# Altium PCB PCB_LilBrain32_2022-08-17.pcbdoc
Units mil, origin at the board's own origin, x right, y up, seen from the top; angles counter-clockwise.
Board outline 3740.15 x 2251.93 mil, 2 copper layers (Top Layer, Bottom Layer); 27 components, 63 nets, 147 pads, 71 vias.
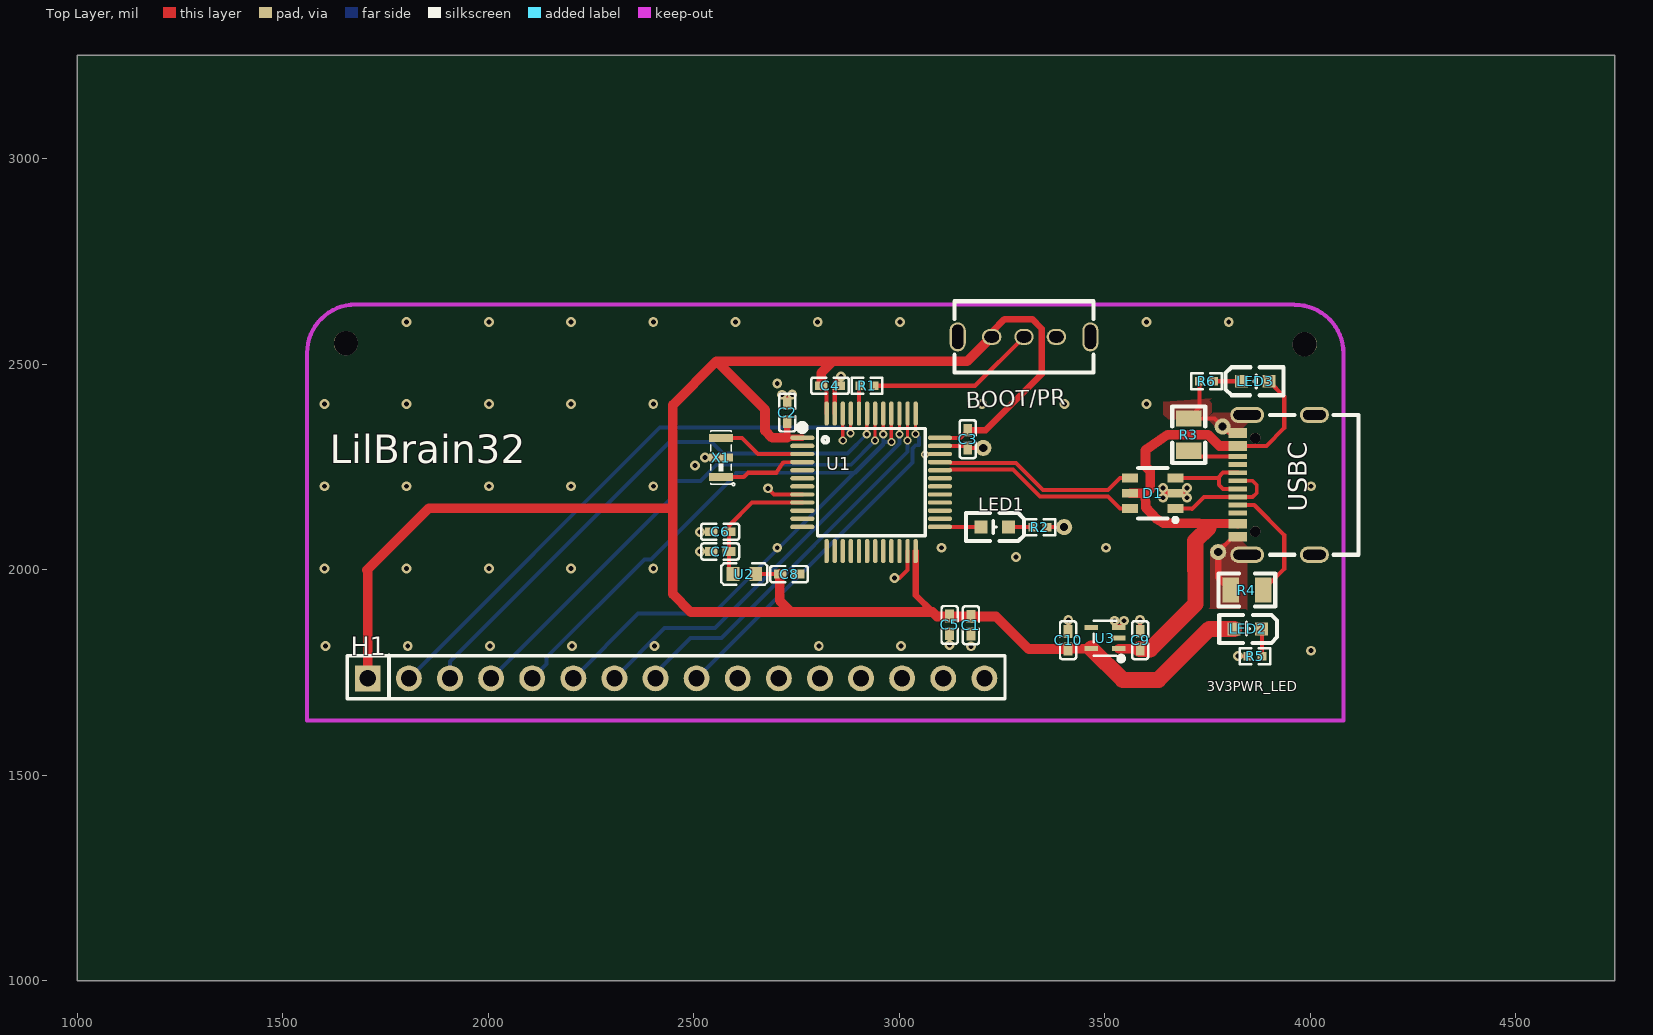
[diagram p0: Top Layer view]
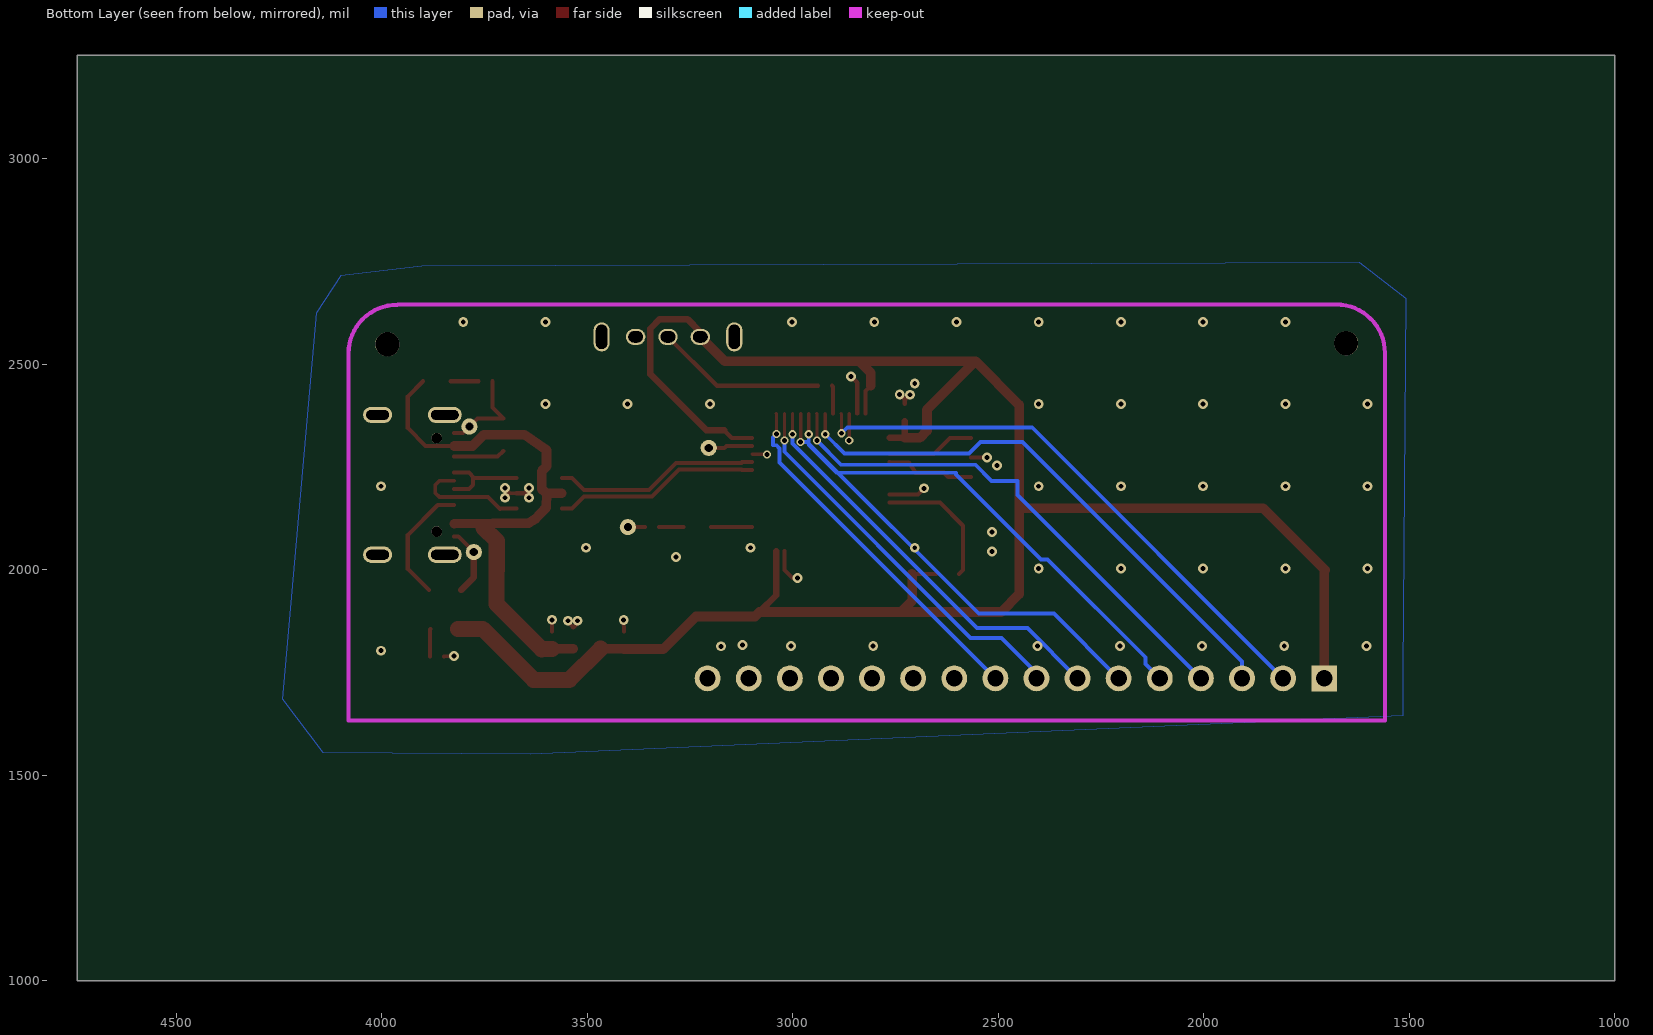
[diagram p1: Bottom Layer view, seen from below]

## Layer stack, top to bottom
Top Layer: signal copper (thickness not stored)
Dielectric: dielectric 12.6, FR-4, Dk 4.8
Bottom Layer: signal copper (thickness not stored)

## Board outline
4740.15,1000 1000,1000 1000,3251.93 4740.15,3251.93

## Components (designator, comment, footprint, x,y, rotation, side; value= is the part's Value field where it differs from the comment)
BOOT/PR "SK-12D02-VG5" SW-TH_SK-12D02VG3 3303.15,2566.93 r180 top
C1 "10uF" C0402 3174.01,1865.35 r90 top
C2 "100nF" C0402 2727.21,2382.7 r270 top
C3 "100nF" C0402 3166.22,2318.05 r90 top
C4 "100nF" C0402 2831.22,2448.05 r180 top
C5 "100nF" C0402 3122.04,1866.14 r90 top
C6 "10nF" C0402 2563.88,2092.9 r0 top
C7 "1uF" C0402 2563.88,2044.71 r0 top
C8 "1uF" C0402 2731.57,1989.85 r180 top
C9 "10uF" C0402 3585.7,1829.03 r270 top
C10 "1uF" C0402 3410.3,1829 r270 top
D1 "USBLC6-2SC6" SOT-23-6_L2.9-W1.6-P0.95-LS2.8-BR 3616.41,2186.51 r0 top
H1 "KH-A2541HWV-16P" HDR-TH_16P-P2.54-V-F 2456.69,1736.22 r0 top
LED1 "19-217/BHC-ZL1M2RY/3T" LED0603-R-RD_BLUE 3231.57,2104.02 r180 top
LED2 "19-217/BHC-ZL1M2RY/3T" LED0603-R-RD_BLUE 3847.54,1856.6 r180 top
LED3 "19-217/BHC-ZL1M2RY/3T" LED0603-R-RD_BLUE 3865.2,2459 r0 top
R1 "10kΩ" R0402 2921.22,2448.05 r0 top
R2 "1.5kΩ" R0402 3341.81,2104.02 r180 top
R3 "5.1k" R0805 3703.81,2329.03 r270 top
R4 "5.1k" R0805 3845.54,1951.08 r0 top
R5 "1.5kΩ" R0402 3865.23,1789.66 r0 top
R6 "3kΩ" R0402 3747.1,2459 r0 top
U1 "STM32F103C8T6" LQFP-48_L7.0-W7.0-P0.50-LS9.0-BL 2931.22,2213.05 r270 top
U2 "ferrite b" L0603 2622.94,1989.59 r0 top
U3 "RT9193-33GU5" SC-70-5_L2.1-W1.3-P0.65-LS2.1-BL 3500.3,1834 r90 top
USBC "TYPE-C" USB-C-SMD_TYPE-C16PIN_C668624 3916.41,2206.99 r90 top
X1 "8MHz" OSC-SMD_3P-L3.2-W1.3-P1.20 2566.22,2273.32 r90 top

## Footprints (in the part's own frame and the unit in brackets; to place one, negate y for a bottom-side part, rotate by r counter-clockwise, add the part's x,y. Pads: shape width x height; smd on the part's side, far side on the other; paste and mask are expansions set on the pad)
C0402 [mm]
  rect 0.79x0.54 smd: 1(-0.545,0) 2(0.545,0)
  silkscreen extent -1.17,-0.5 1.17,0.5
HDR-TH_16P-P2.54-V-F [mm]
  rect 1.6x1.6 hole 1: 1(-19.05,0)
  round 1.6 hole 1: 2(-16.51,0) 3(-13.97,0) 4(-11.43,0) 5(-8.89,0) 6(-6.35,0) 7(-3.81,0) 8(-1.27,0) 9(1.27,0) 10(3.81,0) 11(6.35,0) 12(8.89,0) 13(11.43,0) 14(13.97,0) 15(16.51,0) 16(19.05,0)
  silkscreen extent -20.32,-1.27 20.32,1.4
L0603 [mm]
  rect 0.8x0.864 smd: 1(-0.7,0) 2(0.7,0)
  silkscreen extent -1.42,-0.65 1.41,0.67
LED0603-R-RD_BLUE [mm]
  rect 0.8x0.8 smd: 1(0.851,0) 2(-0.851,0)
  silkscreen extent -1.82,-0.86 1.77,0.86
LQFP-48_L7.0-W7.0-P0.50-LS9.0-BL [mm]
  oval 0.27x1.5 smd: 1(-2.75,-4.25) 2(-2.25,-4.25) 3(-1.75,-4.25) 4(-1.25,-4.25) 5(-0.75,-4.25) 6(-0.25,-4.25) 7(0.25,-4.25) 8(0.75,-4.25) 9(1.25,-4.25) 10(1.75,-4.25) 11(2.25,-4.25) 12(2.75,-4.25) 25(2.75,4.25) 26(2.25,4.25) 27(1.75,4.25) 28(1.25,4.25) 29(0.75,4.25) 30(0.25,4.25) 31(-0.25,4.25) 32(-0.75,4.25) 33(-1.25,4.25) 34(-1.75,4.25) 35(-2.25,4.25) 36(-2.75,4.25)
  oval 1.5x0.27 smd: 13(4.25,-2.75) 14(4.25,-2.25) 15(4.25,-1.75) 16(4.25,-1.25) 17(4.25,-0.75) 18(4.25,-0.25) 19(4.25,0.25) 20(4.25,0.75) 21(4.25,1.25) 22(4.25,1.75) 23(4.25,2.25) 24(4.25,2.75) 37(-4.25,2.75) 38(-4.25,2.25) 39(-4.25,1.75) 40(-4.25,1.25) 41(-4.25,0.75) 42(-4.25,0.25) 43(-4.25,-0.25) 44(-4.25,-0.75) 45(-4.25,-1.25) 46(-4.25,-1.75) 47(-4.25,-2.25) 48(-4.25,-2.75)
  silkscreen extent -3.59,-4.46 3.3,3.34
OSC-SMD_3P-L3.2-W1.3-P1.20 [mm]
  rect 0.5x1.5 smd: 1(-1.2,0) 2(0,0) 3(1.2,0)
  silkscreen extent -1.73,-0.84 1.65,0.64
R0402 [mm]
  rect 0.566x0.54 smd: 1(-0.433,0) 2(0.433,0)
  silkscreen extent -0.94,-0.5 0.94,0.5
R0805 [mm]
  rect 1x1.55 smd: 1(-1,0) 2(1,0)
  silkscreen extent -1.75,-1.02 1.75,1.02
SC-70-5_L2.1-W1.3-P0.65-LS2.1-BL [mm]
  rect 0.315x0.835 smd: 1(-0.65,-0.843) 2(0,-0.843) 3(0.65,-0.843) 4(0.65,0.842) 5(-0.65,0.843)
  silkscreen extent -1.41,-1.15 1.08,0.7
SOT-23-6_L2.9-W1.6-P0.95-LS2.8-BR [mm]
  rect 1x0.55 smd: 1(1.4,-0.95) 2(1.4,0) 3(1.4,0.95) 4(-1.4,0.95) 5(-1.4,0) 6(-1.4,-0.95)
  silkscreen extent -0.9,-1.78 1.52,1.55
SW-TH_SK-12D02VG3 [mm]
  oval 1.2x1 hole 0.7 slot 0.9 at 0 deg: 1(-2,0) 2(0,0) 3(2,0)
  oval 1x1.8 hole 0.7 slot 1.5 at 90 deg: 4(4.1,0) 5(-4.1,0)
  silkscreen extent -4.3,-2.2 4.3,2.2
USB-C-SMD_TYPE-C16PIN_C668624 [mm]
  oval 1x2.1 hole 0.6 slot 1.7 at 90 deg: 1(-4.32,1.787) 2(4.32,1.787)
  oval 1x1.8 hole 0.6 slot 1.4 at 90 deg: 3(-4.32,-2.362) 4(4.32,-2.362)
  rect 0.6x1.15 smd: A1B12(-3.2,2.362) A4B9(-2.4,2.362) B1A12(3.2,2.362) B4A9(2.4,2.362)
  rect 0.3x1.15 smd: A5(-1.25,2.362) A6(-0.25,2.362) A7(0.25,2.362) A8(1.25,2.362) B5(1.75,2.362) B6(0.75,2.362) B7(-0.75,2.362) B8(-1.75,2.362)
  round 0.65 hole 0.65 unplated: ""(-2.89,1.287) ""(2.89,1.287)
  silkscreen extent -4.32,-5.08 4.32,0.38

## Free pads (board coordinates)
  round 39.37 hole 19.69: 2(3204.01,2296.94) 2(3400.86,2104.02) 2(3775.59,2043.3) 2(3786.49,2348.72)
  round 59.17 hole 59.17 unplated: ""(1653.54,2551.18) ""(3985.55,2549.34)

## Via types
v1: diameter 24.02, hole 12.01, Top Layer to Bottom Layer, tented both sides, 43 vias
v2: diameter 24, hole 12, Top Layer to Bottom Layer, tented both sides, 18 vias
v3: diameter 19.69, hole 12, Top Layer to Bottom Layer, tented both sides, 10 vias

## Nets (pads, with @x,y where several pads share a name; then routed paths per layer and width w, separated by ;. In a path a pad name is that pad's centre, name@x,y a point inside that pad or via, vN(x,y) a via of type N, cw(c..) or ccw(c..) an arc to the next point about the centre after c; other vN are vias at no path point)
3V3: BOOT/PR.3 C1.2 C2.2 C3.2 C4.2 C5.2 C8.2 C10.2 H1.1 LED2.1 U1.1 U1.24 U1.36 U1.48 U2.2 U3.5 | length 5382.3
  Top Layer w10: U2.2 C8.2 ; C4.2 2822.95,2434.86 U1.48 ; 3080.51,1897.64 3091.33,1886.82 C1.2 ; U1.36 3148.07,2321.35 C3.2@3166.27,2339.55
  Top Layer w15.75: C2.2 2727.21,2327.91 2733.86,2321.26 U1.1 ; U1.24 3039.49,1938.65 3080.51,1897.64 ; C3.2@3166.27,2339.55 3209.57,2339.55 3346.47,2476.35 3346.47,2586.65 3322.87,2610.25 3255.87,2610.25 3224.47,2578.75 BOOT/PR.3@3224.47,2566.95
  Top Layer w23.62: H1.1 1706.69,1998.03 1704.72,2000 1854.69,2149.96 2448.77,2149.96 ; C8.2 2708.66,1988.4 2708.66,1925.2 2736.22,1897.64 3080.51,1897.64 3091.33,1886.82 C1.2 3235.23,1886.82 3314.51,1807.54 C10.2 ; 2727.49,2321.32 2690.49,2321.32 2673.23,2338.58 2673.23,2389.69 2555.07,2507.85 ; 2736.17,1897.65 2492.17,1897.65 2448.77,1940.95 2448.77,2401.55 2555.07,2507.85 ; C4.2 2809.77,2479.05 2838.57,2507.85 ; BOOT/PR.3@3224.47,2566.95 3165.37,2507.85 2838.57,2507.85 ; C10.2 U3.5 ; 2555.07,2507.85 2838.57,2507.85
  Top Layer w39.37: U3.5 3543.24,1732.28 3629.92,1732.28 3754.23,1856.6 LED2.1
3V3A: C6.2 C7.2 U1.9 U2.1 | length 323.9
  Top Layer w10: U2.1 2585.34,1999.63 C7.2 C6.2 2585.34,2107.4 2641.78,2163.84 U1.9
5V: C9.2 D1.5 LED3.1 U3.1 USBC.A4B9 USBC.B4A9 | length 1403.5
  Top Layer w10: USBC.B4A9 3892.79,2301.47 3936.09,2344.78 3936.09,2421.59 LED3.1
  Top Layer w23.62: U3.1 3576.88,1808.4 3577.7,1807.58 C9.2 ; D1.5 3598.27,2186.55 3599.07,2151.85 3625.07,2124.35 3641.73,2114.17 USBC.A4B9 ; D1.5 3599.9,2186.52 3610.23,2196.85 3610.23,2240.16 3598.42,2251.97 3598.42,2291.34 3652.6,2329 3751.1,2329 3778.6,2301.5 USBC.B4A9
  Top Layer w39.37: C9.2@3585.67,1807.55 3610.23,1807.09 3720.47,1917.32 3719.57,2070.55 3751.96,2102.36
BOOT0: R1.1 U1.44 | length 68.7
  Top Layer w10: U1.44 2901.69,2445.56 R1.1
EN_LDO: U3.2
GND: BOOT/PR.1 C1.1 C2.1 C3.1 C4.1 C5.1 C6.1 C7.1 C8.1 C9.1 C10.1 D1.2 pad.2 R2.1 R3.1 R4.1 R5.1 R6.1 U1.8 U1.23 U1.35 U1.47 U3.3 USBC.1 USBC.2 USBC.3 USBC.4 USBC.A1B12 USBC.B1A12 X1.2 | length 1240.8
  Top Layer w9.45: v2(3640.82,2175.49) 3651.85,2186.52 D1.2 ; v2(3640.82,2199.11) 3653.41,2186.52 D1.2 ; v2(3699.87,2175.49) 3688.84,2186.52 D1.2 ; v2(3699.87,2199.11) 3687.28,2186.52 D1.2
  Top Layer w10: v2@2526.85,2273.32 X1.2 ; v2(2680.39,2198.51) 2695.39,2183.52 U1.8 ; v2(2714.26,2426.08) 2727.21,2413.12 C2.1 2727.21,2414.62 v2@2739.45,2426.86 ; U1.47 2842.64,2455.25 v2(2857.56,2470.17) ; v2(2988.19,1980.32) 2999.97,1980.35 3019.67,2000.05 U1.23 ; U1.35 3161.18,2301.63 C3.1 3203.66,2296.59 pad.2@3204.01,2296.94 ; R2.1@3358.85,2104.03 pad.2@3400.86,2104.03 ; C10.1 v2(3410.9,1877.86) ; v2(3522.85,1876.37) 3522.85,1870.21 U3.3 3546.33,1872.45 v2(3546.33,1876.28) ; C9.1 v2(3585.7,1878.64) ; v2(3640.82,2175.49) v2(3640.82,2199.11) 3640.82,2197.54 3651.84,2186.52 D1.2 ; R6.1 3730.06,2394.66 R3.1 3766.8,2368.41 3786.49,2348.72 3802.24,2332.97 USBC.B1A12 ; pad.2@3775.59,2043.31 3813.28,2081 USBC.A1B12 ; v1(3823.62,1790.55) R5.1@3848.17,1789.65
  Top Layer w15.75: pad.2@3775.59,2043.31 3775.59,1981.65 R4.1
  other v1: 4001.26,1803.44 1603.94,1814.96 1803.94,1814.96 2003.94,1814.96 2203.94,1814.96 2403.94,1814.96 2803.94,1814.96 3003.94,1814.96 1601.26,2003.44 1801.26,2003.44 2001.26,2003.44 2201.26,2003.44 2401.26,2003.44 3283.46,2031.5 2702.79,2053.83 3102.79,2053.83 3502.79,2053.83 1601.26,2203.44 1801.26,2203.44 2001.26,2203.44 2201.26,2203.44 2401.26,2203.44 4001.26,2203.44 2502.79,2253.83 1601.26,2403.44 1801.26,2403.44 2001.26,2403.44 2201.26,2403.44 2401.26,2403.44 3201.26,2403.44 3401.26,2403.44 3601.26,2403.44 2702.79,2453.83 1801.26,2603.44 2001.26,2603.44 2201.26,2603.44 2401.26,2603.44 2601.26,2603.44 2801.26,2603.44 3001.26,2603.44 3601.26,2603.44 3801.26,2603.44
  other v2: 3174.01,1814.18 3122.05,1817.32 2515.04,2044.97 2515.04,2092.22 2526.85,2273.32 2739.45,2426.86
H1_10: H1.10
H1_11: H1.11
H1_12: H1.12
H1_13: H1.13
H1_14: H1.14
H1_15: H1.15
H1_16: H1.16
LED_STATUS: LED1.1 U1.25 | length 99.8
  Top Layer w10: U1.25 3197.32,2104.78 LED1.1
R1_2: BOOT/PR.2 R1.2 | length 414.1
  Top Layer w10: R1.2 3184.25,2448.05 BOOT/PR.2
R2_2: LED1.2 R2.2 | length 59.7
  Top Layer w10: LED1.2 R2.2
R5_2: LED2.2 R5.2 | length 67.4
  Top Layer w10: LED2.2 3882.27,1855.38 R5.2
R6_2: LED3.2 R6.2 | length 67.6
  Top Layer w10: R6.2@3764.16,2458.95 LED3.2
S$6274: 
S$7421: 
SW2_4: BOOT/PR.4
SW2_5: BOOT/PR.5
U1_2: U1.2
U1_5: U1.5
U1_6: U1.6
U1_7: U1.7
U1_10: U1.10
U1_11: U1.11
U1_12: U1.12
U1_13: U1.13
U1_14: U1.14
U1_15: U1.15
U1_16: U1.16
U1_17: U1.17
U1_18: U1.18
U1_19: U1.19
U1_20: U1.20
U1_21: U1.21
U1_22: U1.22
U1_26: U1.26
U1_27: U1.27
U1_28: U1.28
U1_29: U1.29
U1_30: U1.30
U1_31: U1.31
U1_34: U1.34 | length 36.7
  Top Layer w7.87: v3(3062.2,2281.1) 3097.67,2281.1 U1.34
U1_37: H1.9 U1.37 | length 876
  Top Layer w7.87: v3(3039.37,2330.71) 3039.37,2380.24 U1.37
  Bottom Layer w9.45: H1.9 3031.47,2260.95 3031.47,2295.25 3039.37,2303.15 3047.27,2303.15 3047.24,2322.84 v3(3039.37,2330.71)
U1_38: H1.8 U1.38 | length 941.9
  Top Layer w7.87: v3(3019.68,2314.96) 3019.68,2380.25 U1.38
  Bottom Layer w9.45: H1.8 2406.69,1749.21 2492.12,1834.64 2566.93,1834.64 3019.68,2287.39 v3(3019.68,2314.96)
U1_39: H1.7 U1.39 | length 1003.1
  Top Layer w7.87: v3(3000.08,2330.01) 3000.08,2380.32 U1.39
  Bottom Layer w9.45: H1.7 2428.77,1858.25 2551.17,1858.25 3000.07,2307.15 v3(3000.08,2330.01)
U1_40: H1.6 U1.40 | length 1081.1
  Top Layer w7.87: v3(2980.31,2311.02) 2980.31,2380.25 U1.40
  Bottom Layer w9.45: H1.6 2364.17,1893.7 2547.24,1893.7 2964.56,2311.02 v3(2980.31,2311.02)
U1_41: H1.5 U1.41 | length 1178
  Top Layer w7.87: v3(2960.71,2330.01) 2960.71,2380.32 U1.41
  Bottom Layer w9.45: H1.5 2141.73,1771.26 2141.73,1787.4 2379.94,2025.61 2396.08,2025.61 2602.36,2231.89 2602.36,2236.22 2893.7,2236.22 2960.71,2303.23 v3(2960.71,2330.01)
U1_42: H1.4 U1.42 | length 1259.5
  Top Layer w7.87: v3(2940.94,2314.96) 2940.94,2380.27 U1.42@2941.02,2380.35
  Bottom Layer w9.45: H1.4 2452.75,2182.28 2452.75,2216.53 2515.75,2216.53 2555.12,2255.9 2881.89,2255.9 v3(2940.94,2314.96)
U1_43: H1.3 U1.43 | length 1357.1
  Top Layer w7.87: v3@2920.55,2330.01 2920.55,2379.53 U1.43
  Bottom Layer w9.45: H1.3 1906.69,1776.77 2440.94,2311.02 2543.3,2311.02 2570.86,2283.46 2874.01,2283.46 v3(2920.55,2330.01)
U1_45: H1.2 U1.45 | length 1381.4
  Top Layer w7.87: v3(2881.18,2332.37) 2881.18,2379.53 U1.45
  Bottom Layer w9.45: H1.2 2416.93,2346.45 2867.09,2346.45 v3(2881.18,2332.37)
U1_46: U1.46 | length 65.3
  Top Layer w7.87: v3(2862.28,2315.05) U1.46@2862.28,2380.33 ; U1.46@2862.28,2380.33 U1.46
USB2_A5: R4.2 USBC.A5 | length 297.9
  Top Layer w10: USBC.A5 3863.26,2157.78 3936.09,2084.94 3936.09,2002.26 R4.2
USB2_B5: R3.2 USBC.B5 | length 125.3
  Top Layer w10: R3.2 3717.59,2275.89 USBC.B5
USB_CONN_D+: D1.3 USBC.A6 USBC.B6 | length 240.5
  Top Layer w9.45: D1.3 3774.9,2223.92 3787.5,2236.52 ; USBC.A6@3823.4,2197.22 3787.5,2197.22 3777.6,2207.02 3777.6,2226.72 3787.5,2236.52 ; USBC.B6 3787.5,2236.52
USB_CONN_D-: D1.1 USBC.A7 USBC.B7 | length 283.9
  Top Layer w9.45: D1.1 3710.5,2149.12 3711.68,2147.93 3741.21,2177.45 USBC.B7 ; USBC.B7 3859.3,2177.5 3869.2,2187.3 3869.2,2207 3859.3,2216.8 USBC.A7
USB_D+: D1.4 U1.33 | length 503
  Top Layer w10: U1.33 3122.75,2262.26 3124.6,2260.41 3164.6,2260.41 3283.18,2260.41 3349.08,2194.51 3467.67,2194.51 3507.67,2194.51 3537.07,2223.92 D1.4
USB_D-: D1.6 U1.32 | length 503
  Top Layer w10: U1.32 3122.75,2242.58 3124.6,2244.43 3157.98,2244.43 3276.56,2244.43 3342.46,2178.53 3467.67,2178.53 3507.67,2178.53 3537.07,2149.12 D1.6
X1_IN: U1.3 X1.3 | length 213.7
  Top Layer w10: X1.3 2617.41,2320.55 2656.01,2281.95 U1.3
X1_OUT: U1.4 X1.1 | length 215.4
  Top Layer w10: X1.1@2566.27,2226.05 2621.37,2226.05 2631.47,2236.25 2700.77,2236.25 2717.32,2261.42 U1.4@2763.87,2262.25
pads on no net: U3.4 USBC. USBC.A8 USBC.B8

## Polygon pours and split planes (outlines as drawn)
GND on Bottom Layer (solid): 1507.87,2661.41 1515.75,1748.03 1515.75,1645.67 3637.79,1551.18 4141.73,1555.12 4240.15,1685.04 4157.48,2625.98 4098.42,2716.53 3901.57,2740.16 1622.05,2748.03
GND on Top Layer (solid): 1519.68,2669.29 1500,2535.43 1515.75,1539.37 1716.54,1500 4078.74,1582.68 4133.85,1637.8 4133.85,2511.81 4066.92,2704.72 1665.35,2748.03

## Keep-outs
Keep-Out Layer:
  lines w10: 1559.06,2527.56 cw(c1677.16,2527.56) 1677.16,2645.67 ; 3962.2,2644.88 cw(c3962.2,2526.77) 4080.31,2526.77

## Silkscreen, mask and mechanical layers (free items; w line width, h text height)
Top Overlay:
  text "LilBrain32" at 1614.17,2236.22 h118.11
  text "3V3PWR_LED" at 3748.03,1704.73 h23.62
Top Solder:
  circle w27.56 net S$7421: c3985.82,2548.82 r43.76
  circle w27.56 net S$7421: c1653.54,2551.18 r43.76
  lines w78.74: 1559.04,1633.88 1559.04,1740.17 ; 1559.03,2527.58 cw(c1677.14,2527.58) 1677.14,2645.69 ; 3962.18,2644.9 cw(c3962.18,2526.79) 4080.29,2526.79
  lines w78.74 net S$6274: 1559.05,1633.87 4080.64,1633.87 4080.64,2525.67 ; 1559.03,1708.68 1559.03,2527.58 ; 1677.15,2645.67 3960.64,2645.67
  text "DEV_One" at 1618.11,2330.71 h82.68
Bottom Solder:
  circle w27.56 net S$7421: c1653.54,2551.18 r43.76
  circle w27.56 net S$7421: c3985.55,2549.33 r43.76